# Altium PCB Node_Sensor_Lora_PCB.PcbDoc
Units mm, origin at the board's own origin, x right, y up, seen from the top; angles counter-clockwise.
Board outline 71.5 x 50 mm, 2 copper layers (Top Layer, Bottom Layer), stack 1.58 mm thick; 76 components, 65 nets, 321 pads, 67 vias.
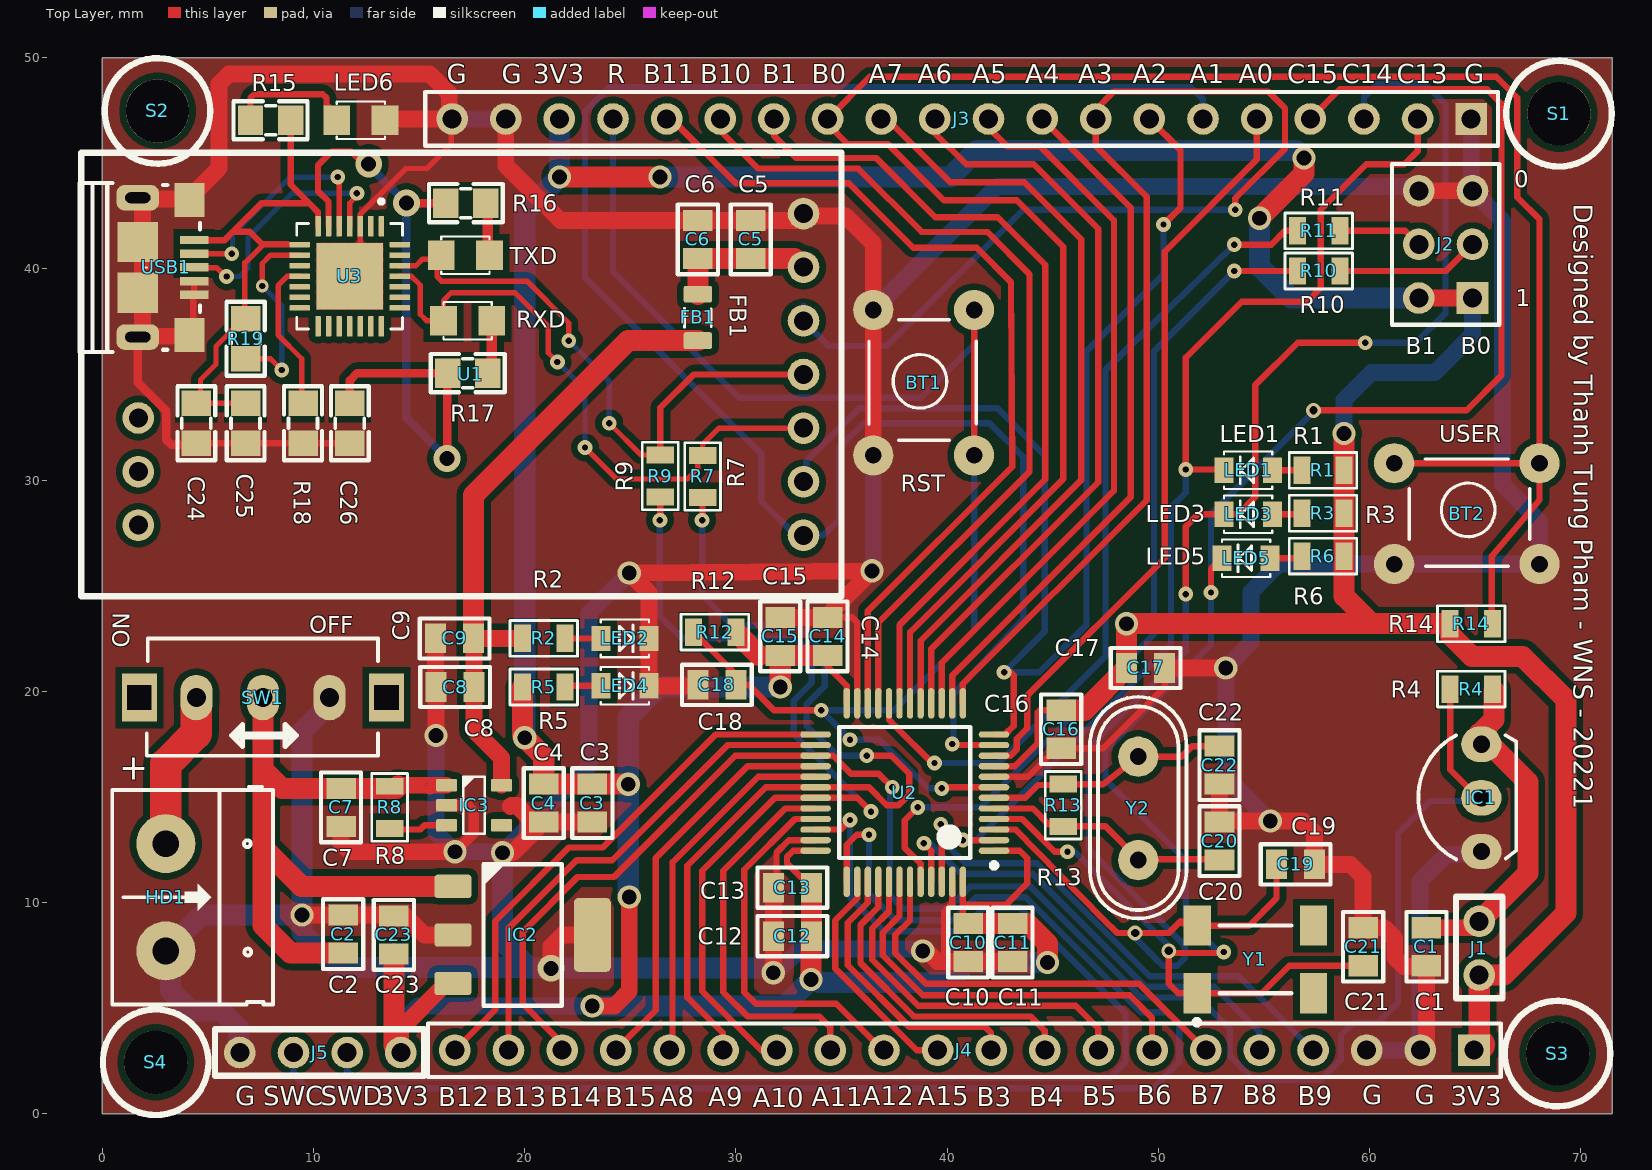
[diagram p0: Top Layer view]
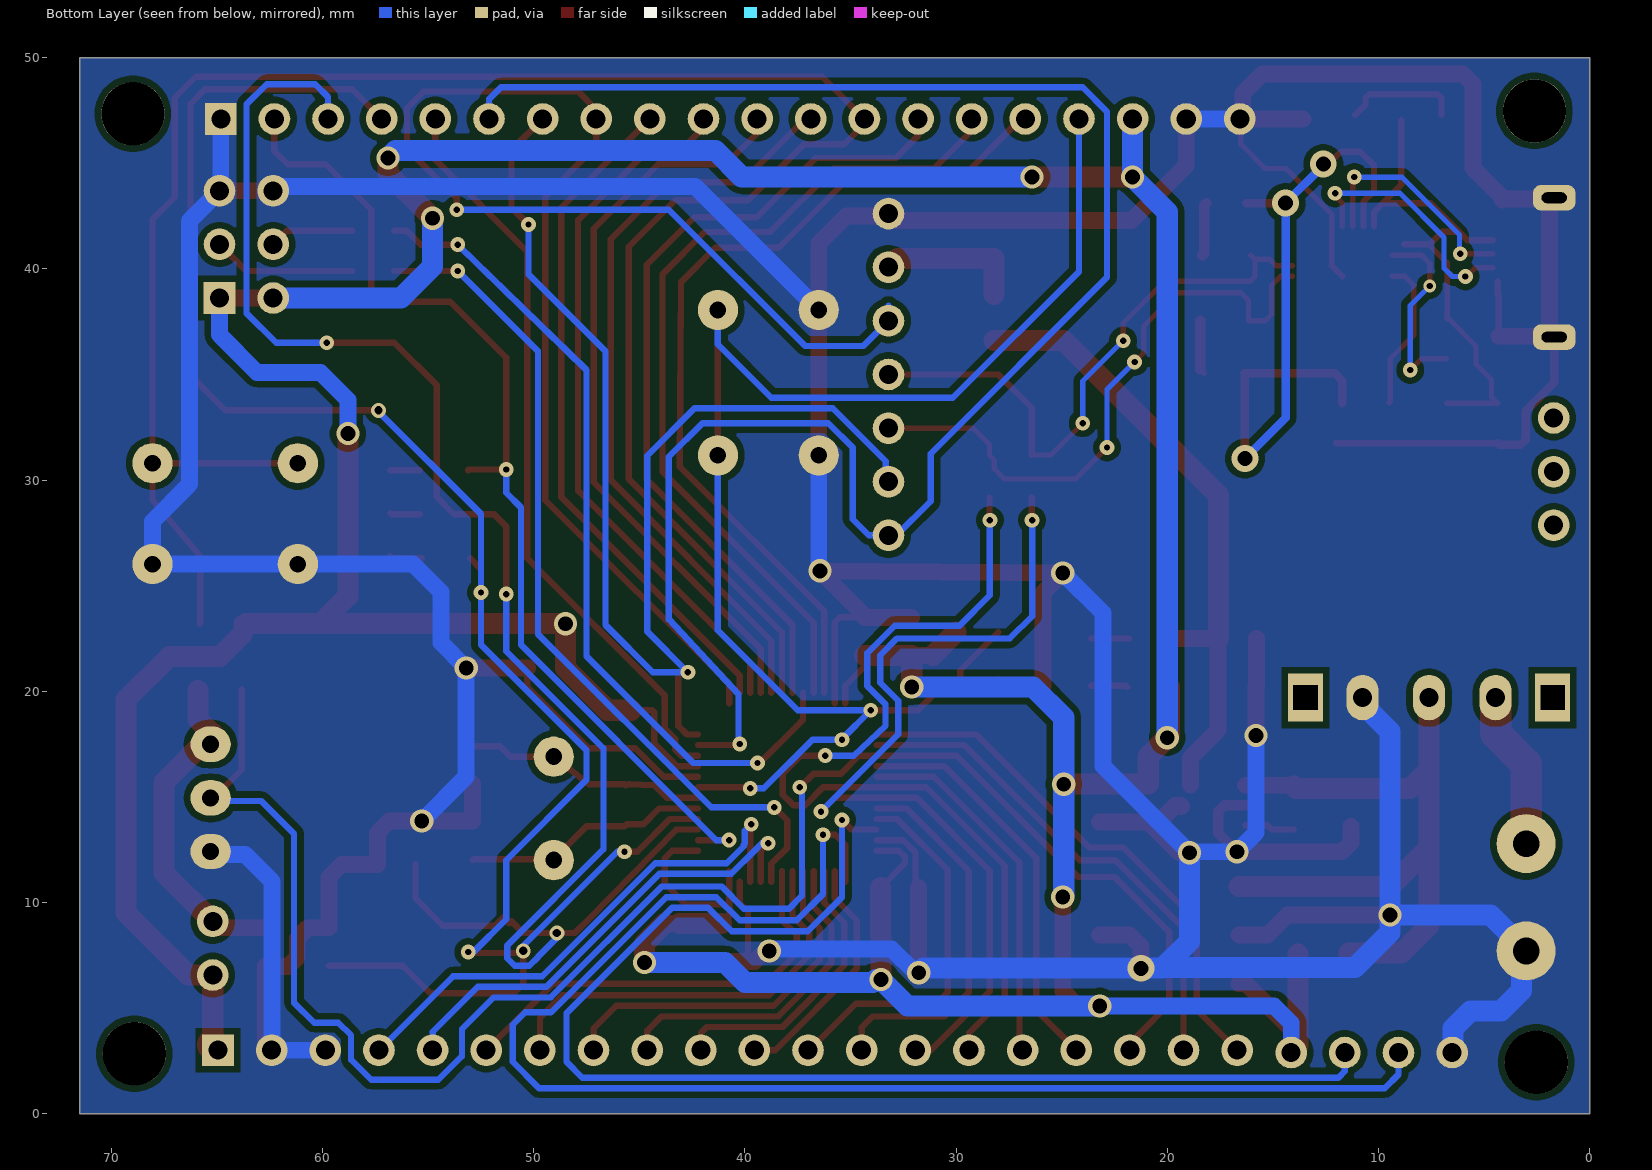
[diagram p1: Bottom Layer view, seen from below]
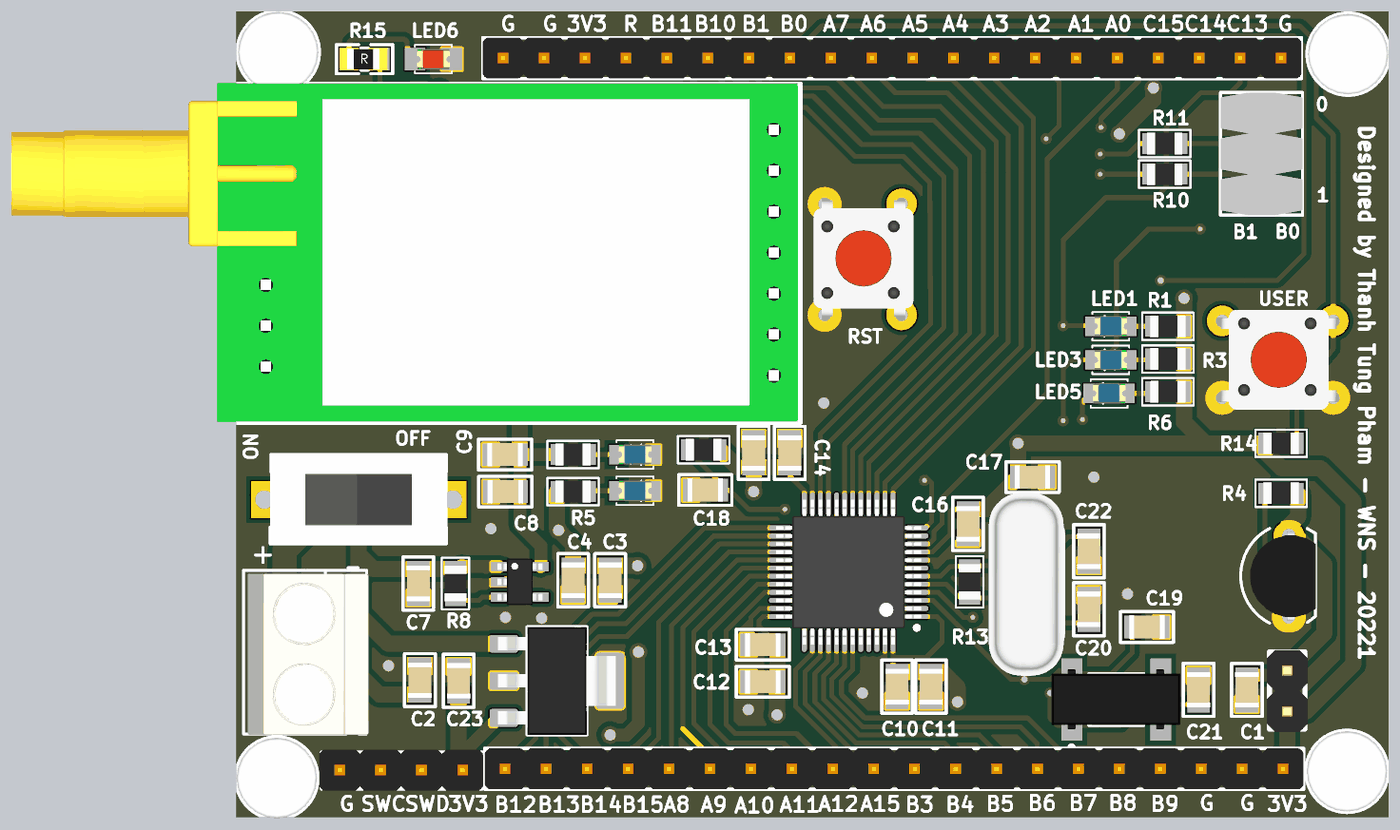
[diagram p2: 3D render of the assembled board from above, using the file's embedded part models]

## Layer stack, top to bottom
Top Solder: solder mask 0.01, Solder Resist, Dk 3.5
Top Layer: signal copper 0.035
Dielectric 1: dielectric 1.51, FR-4, Dk 4.8
Bottom Layer: signal copper 0.035
Bottom Solder: solder mask 0.01, Solder Resist, Dk 3.5

## Board outline
0,0 71.5,0 71.5,50 0,50

## Design rules (kind name [scope] priority, off if disabled: settings)
Clearance [IsRegion] p1: gap=0.3 ignorepadtopadclearanceinfootprint=FALSE
Clearance Clearance_1 [All] p2: gap=0.2 ignorepadtopadclearanceinfootprint=FALSE except(0.3: Fill-Fill Fill-Poly Fill-Region Poly-Poly Poly-Region Region-Region)
ComponentClearance [All] p1: gap=0.1 collisioncheckmode=3 verticalgap=0.1 showdistances=FALSE
HoleSize [All] p1: absolutevalues=TRUE maxlimit=4 minlimit=0.3 maxpercent=80.000 minpercent=20.000
HoleToHoleClearance [All] p1: gap=0.3 allowstackedmicrovias=TRUE
MinimumSolderMaskSliver [All] p1: minsoldermaskwidth=0.1
PolygonConnect [All] p1: connectstyle=Direct reliefconductorwidth=0.254 reliefentries=4 polygonreliefangle="90 Angle" airgapwidth=0.254
RoutingVias PowerVias [InNetClass('POWER')] p1: holewidth=0.7 width=1.1 viastyle="Through Hole" minholewidth=0.7 minwidth=1.1 maxholewidth=0.7 maxwidth=1.1
RoutingVias SignalVias [All] p2: holewidth=0.3 width=0.7 viastyle="Through Hole" minholewidth=0.3 minwidth=0.7 maxholewidth=0.3 maxwidth=0.7
SilkToSilkClearance [All] p1: silktosilkclearance=0.1
SilkToSolderMaskClearance [IsPad] p1: minsilkscreentomaskgap=0.1 clearancetoexposedcopper=TRUE
SolderMaskExpansion [All] p1: expansion=0.1 istentingtop=FALSE
Width POWER [InNetClass('POWER')] p1: maxlimit=1.5 minlimit=0.25 preferedwidth=0.8
Width SIGNAL [All] p2: maxlimit=0.5 minlimit=0.2 preferedwidth=0.3
24 further rules are at their usual default settings.

## Classes and differential pairs
net class POWER: 3.3V 3V3 GND VBAT VCC3.3V VDD3V3 VIN

## Components (designator, comment, footprint, x,y, rotation, side; value= is the part's Value field where it differs from the comment)
BT1 "" SW4 36.3,31.5 r90 top locked
BT2 "BT" SW4 61.5,31 r0 top
C1 "approved sub OK" CAPC2012X135N 62.7,7.9 r90 top value=0.1uF
C2 "approved sub OK" CAPC2012X135N 11.4,8.5 r90 top value=10uF
C3 "approved sub OK" CAPC2012X135N 23.2,14.7 r270 top value=10uF
C4 "approved sub OK" CAPC2012X135N 20.9,14.7 r270 top value=100nF
C5 "approved sub OK" CAPC2012X135N 30.7,41.4 r90 top value=10uF
C6 "approved sub OK" CAPC2012X135N 28.2,41.4 r90 top value=100nF
C7 "approved sub OK" CAPC2012X135N 11.3,14.5 r270 top value=10uF
C8 "approved sub OK" CAPC2012X135N 16.7,20.2 r180 top value=10uF
C9 "approved sub OK" CAPC2012X135N 16.68,22.5 r180 top value=100nF
C10 "approved sub OK" CAPC2012X135N 41,8.1 r270 top value=10uF
C11 "approved sub OK" CAPC2012X135N 43.1,8.1 r270 top value=100nF
C12 "approved sub OK" CAPC2012X135N 32.672,8.4 r180 top value=10uF
C13 "approved sub OK" CAPC2012X135N 32.672,10.7 r180 top value=100nF
C14 "approved sub OK" CAPC2012X135N 34.34,22.6 r90 top value=10uF
C15 "approved sub OK" CAPC2012X135N 32.1,22.6 r90 top value=100nF
C16 "approved sub OK" CAPC2012X135N 45.4,18.2 r270 top value=10uF
C17 "approved sub OK" CAPC2012X135N 49.4,21.1 r0 top value=100nF
C18 "approved sub OK" CAPC2012X135N 29.1,20.3 r180 top value=0.1uF
C19 "approved sub OK" CAPC2012X135N 56.5,11.8 r180 top value=20pF
C20 "approved sub OK" CAPC2012X135N 52.9,12.9 r270 top value=20pF
C21 "approved sub OK" CAPC2012X135N 59.7,7.9 r270 top value=20pF
C22 "approved sub OK" CAPC2012X135N 52.9,16.5 r90 top value=20pF
C23 "approved sub OK" CAPC2012X135N 13.8,8.46 r90 top value=0.1uF
C24 "105" "tu 0805" 4.45,32.69 r270 top
C25 "105" "tu 0805" 6.781,32.69 r270 top
C26 "105" "tu 0805" 11.72,32.69 r270 top
FB1 "2K2 @ 100 MHz" FBC2012N 28.2,37.7 r270 top
HD1 "Header 2" HED2 3,12.78 r270 top
IC1 "DS18S20" DS18S20 65.3,14.95 r90 top
IC2 "TC1262-3.3VDB" SOT223 19.9,8.46 r0 top
IC3 "SPX3819_3V3" SOT23-5 17.6,14.6 r0 top
J1 "Header 2x1" HDR_2x1 65.2,6.56 r90 top
J2 "Header 3X2" HDR2X3 64.88,38.62 r90 top
J3 "Header 20" HDR1X20#1 64.82,47.1 r180 top
J4 "Header 20" HDR1X20#2 64.95,3 r180 top
J5 "Header 4" "HDR _4PINS" 14.13,2.89 r180 top
LED1 "LED SMD" SM-LED-0805-Blue 55.4,30.459 r180 top
LED2 "LED SMD" SM-LED-0805-Blue 23.6,22.5 r0 top
LED3 "LED SMD" SM-LED-0805-Blue 55.4,28.38 r180 top
LED4 "LED SMD" SM-LED-0805-Blue 23.6,20.253 r0 top
LED5 "LED SMD" SM-LED-0805-Blue 55.3,26.3 r180 top
LED6 "LED 0805" LED-0805-Red 11.094,47.039 r0 top
R1 "100R" RESC2012N_ZERO 57.8,30.459 r180 top value=330R
R2 "330R" RESC2012N_ZERO 20.9,22.5 r0 top
R3 "100R" RESC2012N_ZERO 57.8,28.427 r180 top value=330R
R4 "100R" RESC2012N_ZERO 64.82,20.1 r0 top value=10K
R5 "100R" RESC2012N_ZERO 20.9,20.2 r0 top value=330R
R6 "100R" RESC2012N_ZERO 57.8,26.4 r180 top value=330R
R7 "100R" RESC2012N_ZERO 28.42,30.17 r90 top value=330R
R8 "100R" RESC2012N_ZERO 13.6,14.5 r270 top value=100K
R9 "100R" RESC2012N_ZERO 26.42,30.19 r90 top value=330R
R10 "100R" RESC2012N_ZERO 57.6,39.9 r0 top value=100K
R11 "100R" RESC2012N_ZERO 57.6,41.8 r180 top value=100K
R12 "100R" RESC2012N_ZERO 29,22.8 r180 top value=10K
R13 "100R" RESC2012N_ZERO 45.5,14.6 r90 top value=1M
R14 "100R" RESC2012N_ZERO 64.82,23.2 r0 top value=10K
R15 "1K" "tro smd 0805" 7.96,47.1 r0 top
R16 "1K" "tro smd 0805" 17.21,43.05 r180 top
R17 "1K" "tro smd 0805" 17.3,35 r180 top
R18 "10K" "tro smd 0805" 9.44,32.69 r90 top
R19 "4.7K" "tro smd 0805" 6.72,36.69 r90 top
RXD "LED 0805" LED-0805-Red 18.436,37.54 r180 top (schematic designator LED8)
S1 "Screw" "SCREW 3 SMALL" 68.98,47.35 r0 top
S2 "Screw" "SCREW 3 SMALL" 2.61,47.48 r0 top
S3 "Screw" "SCREW 3 SMALL" 68.91,2.84 r0 top
S4 "Screw" "SCREW 3 SMALL" 2.52,2.43 r0 top
SW1 "SS-12F44" SW102 7.6,19.7 r0 top value="Switch 102 On Board"
TXD "LED 0805" LED-0805-Green 18.33,40.64 r180 top (schematic designator LED7)
U1 "EE32_TTL_100" E32_TTL_100 17,35 r180 top locked
U2 "STM32F103C8T6" STM32_LQPF48 37.997,15.2 r180 top locked
U3 "CP2102" CP2102 11.71,39.65 r270 top locked
USB1 "USB Micro 5p DIP" "USB Micro 5p DIP" 1.675,40.069 r270 top
Y1 "32.7680KHz" Epson_MC-306_32.7680K-A0-ROHS_0 54.6,7.3 r0 top
Y2 "8MHz" CRYSTAL 49.05,14.45 r270 top value=4Mhz

## Footprints (in the part's own frame and the unit in brackets; to place one, negate y for a bottom-side part, rotate by r counter-clockwise, add the part's x,y. Pads: shape width x height; smd on the part's side, far side on the other; paste and mask are expansions set on the pad)
CAPC2012X135N [mm] "Chip Capacitor, Body 2.0x1.2mm, EIA 0805, IPC Medium Density"
  round 0.254 on Mech15: 0(0,0)
  rect 1x1.4 smd: 1(-0.9,0) 2(0.9,0)
  silkscreen extent -1.65,-0.95 1.65,0.95, body extent -1.1,-0.72 1.1,0.73, height 1.34
CP2102 [mm]
  rrect25% 0.97x0.26 smd: 1(-2.37,1.5) 2(-2.37,1) 3(-2.37,0.5) 4(-2.37,0) 5(-2.37,-0.5) 6(-2.37,-1) 7(-2.37,-1.5) 15(2.37,-1.5) 16(2.37,-1) 17(2.37,-0.5) 18(2.37,0) 19(2.37,0.5) 20(2.37,1) 21(2.37,1.5)
  rrect25% 0.26x0.97 smd: 8(-1.5,-2.37) 9(-1,-2.37) 10(-0.5,-2.37) 11(0,-2.37) 12(0.5,-2.37) 13(1,-2.37) 14(1.5,-2.37) 22(1.5,2.37) 23(1,2.37) 24(0.5,2.37) 25(0,2.37) 26(-0.5,2.37) 27(-1,2.37) 28(-1.5,2.37)
  rect 3.15x3.15 smd paste-0.575: 29(0,0)
  silkscreen extent -3.64,-2.5 2.5,2.5
CRYSTAL [mm]
  round 1.905 hole 0.8: 1(-2.45,0) 2(2.45,0)
  silkscreen extent -5.28,-2.29 5.21,2.29, body extent -5.68,-2.36 5.68,2.29, height 3.5
DS18S20 [mil] "TO-92"
  oval 66x75 hole 32: 1(100,0) 2(0,0) 3(-100,0)
  silkscreen extent -115,-65 117,117, body extent -109,-66 109,95, height 385
E32_TTL_100 [mm]
  round 1.5 hole 0.9: 1(-16.2,7.62) 2(-16.2,5.08) 3(-16.2,2.54) 4(-16.2,0) 5(-16.2,-2.54) 6(-16.2,-5.08) 7(-16.2,-7.62) 8(15.3,7.14) 9(15.3,4.6) 10(15.3,2.06)
  silkscreen extent -18,-10.5 18,10.5, body extent -17.84,-10.55 30.94,10.45, height 9.01
Epson_MC-306_32.7680K-A0-ROHS_0 [mm]
  rect 1.3x1.9 smd paste+0 mask+0: 1(-2.75,-1.6) 2(2.75,-1.6) 3(2.75,1.6) 4(-2.75,1.6)
  silkscreen extent -2.9,-3.1 1.7,1.6, body extent -4.1,-2.65 4.1,2.65, height 0.25
FBC2012N [mm] "Ferrite Bead Chip, Body 2.0x1.2mm, 0805, IPC Medium Density"
  round 0.508 on Mech15: 0(0,0)
  rrect25% 0.8x1.35 smd: 1(-1.1,0) 2(1.1,0)
  silkscreen extent -0.43,-0.64 0.46,0.64, body extent -1,-0.62 1,0.63, height 0.9
HDR1X20#1 [mm] "Connector; Header; 20 Position"
  rect 1.5x1.5 hole 0.9: 1(0,0)
  round 1.5 hole 0.9: 2(2.54,0) 3(5.08,0) 4(7.62,0) 5(10.16,0) 6(12.7,0) 7(15.24,0) 8(17.78,0) 9(20.32,0) 10(22.86,0) 11(25.4,0) 12(27.94,0) 13(30.48,0) 14(33.02,0) 15(35.56,0) 16(38.1,0) 17(40.64,0) 18(43.18,0) 19(45.72,0) 20(48.26,0)
  silkscreen extent -1.27,-1.27 49.53,1.27, body extent -1.27,-1.27 49.53,1.27, height 8.89
HDR1X20#2 [mm] "Connector; Header; 20 Position"
  rect 1.5x1.5 hole 0.9: 1(0,0)
  round 1.5 hole 0.9: 2(2.54,0) 3(5.08,0) 4(7.62,0) 5(10.16,0) 6(12.7,0) 7(15.24,0) 8(17.78,0) 9(20.32,0) 10(22.86,0) 11(25.4,0) 12(27.94,0) 13(30.48,0) 14(33.02,0) 16(38.1,0) 17(40.64,0) 18(43.18,0) 19(45.72,0) 20(48.26,0)
  round 1.5 hole 0.9 mask+0.1: 15(35.56,0)
  silkscreen extent -1.27,-1.27 49.53,1.27, body extent -1.27,-1.27 49.53,1.27, height 8.89
HDR2X3 [mm] "Connector; Header; 3x2 Position"
  rect 1.5x1.5 hole 0.9: 1(0,0)
  round 1.5 hole 0.9: 2(0,2.54) 3(2.54,0) 4(2.54,2.54) 5(5.08,0) 6(5.08,2.54)
  silkscreen extent -1.27,-1.27 6.35,3.81, body extent -1.27,-1.27 6.35,3.81, height 8.77
"HDR _4PINS" [mm]
  round 1.5 hole 0.9: 1(0,0) 2(2.54,0) 3(5.08,0) 4(7.62,0)
  silkscreen extent -1.1,-1.1 8.8,1.1, body extent -1.18,-1.3 8.98,1.24, height 8.89
HDR_2x1 [mm]
  round 1.5 hole 0.9: 1(0,0) 2(2.54,0)
  silkscreen extent -1.1,-1.1 3.7,1.1, body extent -1.27,-1.27 3.81,1.27, height 8.54
HED2 [mil] "Header 2, 2 pin, hight 300mil, Pin to Pin 200, Colour Green"
  round 110 hole 50: 1(0,0) 2(200,0)
  silkscreen extent -106,-100 300,200, body extent -92,-90 302,205, height 394
LED-0805-Green [mil]
  rect 50x55 smd: 1(0,0) 2(90,0)
  silkscreen extent 0,-35 90,35, body extent 5,-25 85,25, height 43
LED-0805-Red [mil]
  rect 50x55 smd: 1(0,0) 2(90,0)
  silkscreen extent 0,-35 90,35, body extent 5,-25 85,25, height 43
RESC2012N_ZERO [mm] "Chip Resistor, Body 2.0x1.2mm, 0805, IPC Medium Density"
  rect 0.8x1.3 smd: 1(-1,0) 2(1,0)
  silkscreen extent -1.6,-0.85 1.6,0.85, body extent -1.1,-0.67 1.1,0.68, height 0.69
"SCREW 3 SMALL" [mm] "Hole 3mm, outline 5mm"
  round 3 hole 3 mask+0.1: 1(0,0)
  silkscreen extent -2.5,-2.5 2.5,2.5, body extent -2.5,-2.5 2.5,2.5, height 1.73
SM-LED-0805-Blue [mm]
  rect 0.9x1.2 smd: 1(0,0) 2(2.286,0)
  silkscreen extent 0,-0.89 2.29,0.89, body extent 0.13,-0.62 2.15,0.63, height 1.1
SOT23-5 [mm]
  round 0.5 on Mech15: 0(0,0)
  rrect25% 1x0.6 smd: 1(-1.3,0.95) 2(-1.3,0) 3(-1.3,-0.95) 4(1.3,-0.95) 5(1.3,0.95)
  silkscreen extent -0.51,-1.35 0.51,1.35, body extent -1.4,-1.45 1.4,1.45, height 1.44
SOT223 [mm] "SOT223 /SC-73"
  round 1 on Mech15: 0(0,0)
  rrect25% 1.75x1.1 smd: 1(-3.3,2.3) 2(-3.3,0) 3(-3.3,-2.3)
  rrect25% 1.75x3.5 smd: 4(3.3,0)
  silkscreen extent -1.85,-3.35 1.85,3.35, body extent -3.65,-3.35 3.65,3.35, height 1.8
STM32_LQPF48 [mm]
  oval 1.45x0.3 smd: 1(-4.225,2.75) 2(-4.225,2.25) 3(-4.225,1.75) 4(-4.225,1.25) 5(-4.225,0.75) 6(-4.225,0.25) 7(-4.225,-0.25) 8(-4.225,-0.75) 9(-4.225,-1.25) 10(-4.225,-1.75) 11(-4.225,-2.25) 12(-4.225,-2.75) 25(4.225,-2.75) 26(4.225,-2.25) 27(4.225,-1.75) 28(4.225,-1.25) 29(4.225,-0.75) 31(4.225,0.25) 32(4.225,0.75) 33(4.225,1.25) 34(4.225,1.75) 35(4.225,2.25) 36(4.225,2.75)
  oval 0.3x1.45 smd: 13(-2.75,-4.225) 14(-2.25,-4.225) 15(-1.75,-4.225) 16(-1.25,-4.225) 17(-0.75,-4.225) 18(-0.25,-4.225) 19(0.25,-4.225) 20(0.75,-4.225) 21(1.25,-4.225) 22(1.75,-4.225) 23(2.25,-4.225) 24(2.75,-4.225) 37(2.75,4.225) 38(2.25,4.225) 39(1.75,4.225) 40(1.25,4.225) 41(0.75,4.225) 42(0.25,4.225) 43(-0.25,4.225) 44(-0.75,4.225) 45(-1.25,4.225) 46(-1.75,4.225) 47(-2.25,4.225) 48(-2.75,4.225)
  oval 1.45x0.3 smd mask+0.1: 30(4.225,-0.25)
  silkscreen extent -4.35,-3.1 3.1,3.57, body extent -4.5,-4.5 4.5,4.5, height 1.6
SW4 [mil] "SW button 4pin, 250 x250 mil"
  round 75 hole 31: 1(-13,-8) 1(258,-8) 2(-13,-196) 2(258,-196)
  silkscreen extent 15,-200 240,0, body extent -31,-225 281,19, height 276
SW102 [mil] "Switch 102 On Board nho"
  oval 60x85 hole 35: 1(-124.02,0) 2(0,0) 3(124.02,0)
  rect 65x90 hole 45 square: 4(230.31,0) 5(-230.32,0)
  silkscreen extent -217,-108 215,110, body extent -217,-110 216,110, height 384
"tro smd 0805" [mm]
  rect 1.2x1.4 smd: 1(-0.946,-0.061) 2(0.954,-0.061)
  silkscreen extent -1.75,-0.97 1.75,0.84, body extent -1.56,-0.76 1.44,0.64, height 0.53
"tu 0805" [mm] "Compoment SMD 80x50mil"
  rect 1.2x1.4 smd: 1(-0.946,-0.003) 2(0.954,-0.003)
  silkscreen extent -1.75,-0.89 1.75,0.89, body extent -1.01,-0.64 1.01,0.63, height 0.61
"USB Micro 5p DIP" [mm]
  rect 0.4x1.35 smd mask+0.05: 1(-1.3,2.675) 2(-0.65,2.675) 3(0,2.675) 4(0.65,2.675) 5(1.3,2.675)
  rrect60% 1.2x2 hole 0.5 slot 1.2 at 90 deg: 5(-3.3,0) 5(3.3,0)
  rect 1.6x1.4 smd: 5(-3.2,2.45) 5(3.2,2.45)
  rect 1.9x1.9 smd paste-10: 5(-1.2,0) 5(1.2,0)
  silkscreen extent -4,-2.75 4,2.95, body extent -3.93,-2.76 3.93,2.9, height 2.85

## Part data
BT1 BT2: library part BUTTON
C1 C2 C3 C4 C5 C6 C7 C8 C9 C10 C11 C12 C13 C14 C15 C16 C17 C18 C19 C20 C21 C22 C23: library part "CAP C_0805", "Capacitor SMD Cer 1.8nF 10% 50V X7R 0805", Manufacturer 1="AVX Corporation", Manufacturer Part Number 1=08055C182KAT2A, Operating Temperature="-55°C ~ 125°C", Package / Case="0805 (2012 metric)", Ratings="50V; X7R", Supplier Part Number 1=478-1374-1-ND, Tolerance=±10%, SCDType=source*, Supplier 1=Digi-Key
C24 C25 C26: library part "Tu 0805 105 50V 10%", "Dán", Chung_Loai=Dán, Don_Vi=Con, Ma_Hang=MH004552, So_Chan=2, Ten_Linh_Kien="Tụ 0805 105-1uF 10% 50V"
FB1: library part FERRITE_2K2-100MHz_0805, "Ferrite bead 2.2K Ohm at 100 MHz 200mA 0805 SMD", Current Rating=200mA, DC Resistance (DCR)="800 mOhm Max", Impedance @ Frequency="600 Ohm @ 100MHz", Manufacturer 1="Laird-Signal Integrity Products", Manufacturer Part Number 1=HZ0805B222R-10, Package / Case="0805 (2012 Metric)", Ratings="200 mA; 800 mOhm DC", Supplier Part Number 1=240-2562-1-ND, ComponentLink1Description=http://www.lairdtech.com/WorkArea/linkit.aspx?LinkIdentifier=id&ItemID=4879, ComponentLink1URL=http://www.lairdtech.com/WorkArea/linkit.aspx?LinkIdentifier=id&ItemID=4879, Filter Type="Differential Mode - Single", Height (Max)="0.043\" (1.09mm)", Mounting Type="Surface Mount", SCDType=source, Size / Dimension="0.063\" L x 0.031\" W (1.60mm x 0.80mm)", Supplier 1=Digi-Key
HD1: "Header 2 (Green)"
IC1: "High Precision  1-Wire® Digital Thermometer"
IC2: library part AMS1117, "SOT223, Fixed Voltage"
IC3: library part SPX3819
J1: library part Header_2pins
J2: "Header, 3-Pin, Dual row", LatestRevisionDate=17-Jul-2002, LatestRevisionNote="Re-released for DXP Platform.", Publisher="Altium Limited"
J3 J4: "Header, 20-Pin", LatestRevisionDate=17-Jul-2002, LatestRevisionNote="Re-released for DXP Platform.", Publisher="Altium Limited"
J5: "Header 4 (Green)"
LED1 LED2 LED3 LED4 LED5: library part "LED SMD 0805"
LED6 RXD: library part "LED 0805 Do", "Dán", Chung_Loai=Dán, Don_Vi=Con, Ma_Hang=MH000897, Ten_Linh_Kien="LED 0805 Màu Đỏ (Red)"
R1 R2 R3 R4 R5 R6 R7 R8 R9 R10 R11 R12 R13 R14: library part RES_0805, "Resistor SMD chip 0.0 Ohm 0.125W 0805", Manufacturer 1="Samsung Electro-Mechanics America, Inc", Manufacturer 2="Stackpole Electronics Inc", Manufacturer 3=Yageo, Manufacturer 4="Panasonic Electronic Components", Manufacturer 5="Rohm Semiconductor", Manufacturer Part Number 1=RC2012J000CS, Manufacturer Part Number 2=RMCF0805ZT0R00, Manufacturer Part Number 3=RC0805JR-070RL, Manufacturer Part Number 4=ERJ-6GEY0R00V, Manufacturer Part Number 5=MCR10ERTJ000, Package / Case="0805 (2012 metric)", Ratings=1/8W, Supplier Part Number 1=1276-5466-6-ND, Tolerance=N/A, RoHS 1="RoHS Compliant", RoHS 2="RoHS Compliant", RoHS 3="RoHS Compliant", RoHS 4="RoHS Compliant", RoHS 5="RoHS Compliant", SCDType=spec, Supplier 1=Digi-Key, Supplier 2=Digi-Key, Supplier 3=Digi-Key, Supplier 4=Digi-Key, Supplier 5=Digi-Key, Supplier Part Number 2=RMCF0805ZT0R00DKR-ND, Supplier Part Number 3=311-0.0ARDKR-ND, Supplier Part Number 4=P0.0ADKR-ND, Supplier Part Number 5=RHM0.0CPDKR-ND
R15 R16 R17 R18 R19: library part "Tro 0805 1% 10k", "Dán", Chung_Loai=Dán, Don_Vi=Con, Ma_Hang=MH005473, So_Chan=2, Ten_Linh_Kien="Trở 0805 1% 10k"
SW1: library part SW102A, "Switch 102 on Broad"
TXD: library part "LED 0805 Xanh La", "Dán", Chung_Loai=Dán, Don_Vi=Con, Ma_Hang=MH002326, Ten_Linh_Kien="LED 0805 Màu Xanh Lá (Green)"
U1: library part "Module Lora E32_TTL_100"
U2: library part STM32F103xx_LQFP48, "STM32 ARM-based 32-bit MCU with 64 Kbytes Flash, 48-pin LQFP, Industrial Temperature", ComponentLink1Description="Manufacturer Link", ComponentLink1URL=www.st.com/stm32, ComponentLink2Description=Datasheet, ComponentLink2URL=http://www.st.com/stonline/products/literature/ds/13587.pdf, DatasheetVersion="rev6, Mar-2008", PackageDescription="48-Pin Low-Profile Quad Flat Pack, 7 x 7 mm Body, 0.5 mm Pitch (LQFP48)", PackageReference=LQFP48, PackageVersion=Mar-2008, Published=30-May-2008, Publisher="Altium Limited"
USB1: "USB Type B", Ma_Hang=MH005145, Ten="MicroUSB MK5P DIP"
Y1: library part Crys_Epson_MC-306_32.7680K-A0-ROHS_eec, "CRYSTAL 32.7680KHZ 12.5PF SMD", Digikey Part Number=SER2407CT-ND, Manufacturer=Epson, Mouser Part Number=732-MC30632.7680KA0R, Package=SMT_XTAL_8MM0_3MM20, Part Number=MC-306, Temperature="-40°C to +85°C", Temperature Range High=+85°C, Temperature Range Low=-40°C, ComponentLink1Description=Upverter, ComponentLink1URL=https://upverter.com/upn/revision/56373362b6f292da/, ComponentLink2Description=Datasheet, ComponentLink2URL=http://media.digikey.com/pdf/Data%20Sheets/Epson%20PDFs/MC-306%20,405,%20406.pdf, Digikey Description="CRYSTAL 32.7680KHZ 12.5PF SMD", helpURL=https://upverter.com/upn/revision/56373362b6f292da/, Lead Free=yes, Price=0.391082880903, RoHS=TRUE, Supplier 1=Digi-Key, Supplier 2=Mouser, Supplier Part Number 1=SER2407CT-ND, Supplier Part Number 2=732-MC30632.7680KA0R
Y2: library part CRYSTAL, "Crystal For all Crystal 2pin."

## Via types
v1: diameter 0.7, hole 0.3, Top Layer to Bottom Layer, tented both sides, 36 vias
v2: diameter 1.1, hole 0.7, Top Layer to Bottom Layer, tented both sides, 23 vias
v3: diameter 1.27, hole 0.711, Top Layer to Bottom Layer, tented both sides, 4 vias
v4: diameter 0.7, hole 0.4, Top Layer to Bottom Layer, tented both sides, 3 vias
v5: diameter 0.6, hole 0.3, Top Layer to Bottom Layer, tented both sides, 1 vias

## Nets (pads, with @x,y where several pads share a name; then routed paths per layer and width w, separated by ;. In a path a pad name is that pad's centre, name@x,y a point inside that pad or via, vN(x,y) a via of type N, cw(c..) or ccw(c..) an arc to the next point about the centre after c; other vN are vias at no path point)
3.3V: C8.1 C9.1 FB1.2 IC3.5 R2.1 | length 30.1
  Top Layer w0.8: C9.1 R2.1 ; C9.1@17.6,22.38 C8.1 17.6,18.15 18.9,16.85 IC3.5
  Top Layer w1: C9.1 17.58,29.28 24.9,36.6 FB1.2
3V3: C3.1 C4.1 C10.1 C11.1 C12.1 C13.1 C14.1 C15.1 C16.1 C17.1 C23.1 IC2.3 J1.1 J2.1 J2.2 J3.18 J4.1 J5.1 R1.1 R3.1 R5.1 R6.1 R12.1 R14.1 U2.1 U2.9 U2.24 U2.36 U2.48 | length 260.9
  Top Layer w0.3: C13.1 32.42,11.852 32.42,12.156 32.714,12.45 U2.36 ; C14.1 34.34,21.16 35.247,20.253 U2.24 ; U2.48@40.747,11.475 U2.48 40.747,9.9 ; C10.1@41.1,9 40.747,9.353 40.747,9.9 ; U2.1 43.443,12.45 43.8,12.093 43.8,10.9 42.8,9.9 40.747,9.9 ; U2.9 43.211,16.45 44.3,17.539 44.3,19 44.4,19.1 C16.1
  Top Layer w0.8: J5.1 14.13,4.015 16.275,6.16 IC2.3 ; v2(23.2,5.1) 24.25,5.1 24.95,5.8 v2(24.95,10.25) ; 31.1,21.7 C15.1 ; C12.1@33.55,8.378 C12.1 ; C11.1 43.8,9 ; J2.2 J2.1 ; R14.1@63.62,23.2 63.72,23.1 R14.1 R14.1@63.82,22.68
  Top Layer w1: C23.1 13.8,3.22 J5.1 ; R5.1 19.9,17.9 v2(20,17.8) 20.9,16.9 C4.1 C3.1 v2(24.9,15.6) ; v2(21.65,44.35) v2(26.4,44.35) ; R12.1 31.1,21.7 ; v2(32.1,20.2) C15.1 C14.1 ; v2(33.55,6.35) C12.1@33.55,8.378 ; C12.1 C13.1 ; C10.1@41.1,9 C11.1 ; 43.8,9 44.75,8.05 v2(44.75,7.15) ; C16.1 46.5,19.1 C17.1 v2(48.5,23.2) 60.1,23.2 ; v2(54.79,42.4) 56.9,44.51 v2(56.9,45.25) ; v2(58.8,32.2) R1.1 R3.1 R6.1 58.8,24.5 60.1,23.2 ; R14.1@63.62,23.2 60.1,23.2 ; R14.1@63.82,22.68 64.85,21.65 67.25,21.65 69.3,19.6 69.3,9.5 66.36,6.56 J1.1 J4.1@65.2,3.26
  Top Layer w1.5: J4.1@64.94,3 J4.1@65.2,3.26
  Bottom Layer w0.8: J5.1 14.13,4.29 14.94,5.1 v2(23.2,5.1) ; v2@21.64,44.36 v2(21.65,44.35) ; v2(58.8,32.2) 58.8,33.8 60.1,35.1 63.1,35.1 64.88,36.88 J2.1
  Bottom Layer w1: v2(20,17.8) 20,42.7 v2(21.65,44.35) ; v2@21.64,44.36 J3.18 ; v2(23.2,5.1) 32.3,5.1 v2(33.55,6.35) 33.794,6.35 33.944,6.2 40,6.2 40.95,7.15 v2(44.75,7.15) ; v2(24.95,10.25) 24.95,10.277 24.9,10.327 v2(24.9,15.6) 24.9,18.75 26.35,20.2 v2(32.1,20.2) ; v2(26.4,44.35) 40.15,44.35 41.4,45.6 56.55,45.6 v2(56.9,45.25) ; v2(54.79,42.4) 54.79,40.11 56.28,38.62 J2.2
BOOT0: R10.1 U2.44 | length 40.4
  Top Layer w0.3: v1(38.61,14.5) 38,13.89 38,12.577 38.747,11.83 U2.44 ; v1(53.6,39.9) R10.1
  Bottom Layer w0.3: v1(38.61,14.5) 41.6,14.5 49.8,22.7 49.8,36.1 v1(53.6,39.9)
DM: U3.5 USB1.2 | length 10.9
  Top Layer w0.25: USB1.2@4.586,40.719 v1(6.129,40.72) ; v1(11.14,44.355) 11.21,44.285 U3.5
  Bottom Layer w0.25: v1(6.129,40.72) 6.158,40.749 6.158,41.618 8.88,44.34 11.125,44.34 v1(11.14,44.355)
DP: U3.4 USB1.3 | length 11.8
  Top Layer w0.25: USB1.3@4.575,40.06 5.4,40.06 5.82,39.64 v1(5.88,39.64) ; U3.4 11.71,43.118 12.05,43.458 v1(12.05,43.58)
  Bottom Layer w0.25: v1(5.88,39.64) 6.499,39.64 6.89,40.031 6.89,41.49 8.98,43.58 v1(12.05,43.58)
GND: BT1.1 BT2.2 C1.1 C2.2 C3.2 C4.2 C5.2 C6.2 C7.2 C8.2 C9.2 C10.2 C11.2 C12.2 C13.2 C14.2 C15.2 C16.2 C17.2 C18.2 C19.1 C20.1 C21.1 C22.1 C23.2 C24.2 C25.2 C26.2 HD1.2 IC1.3 IC2.2 IC2.4 IC3.2 J2.5 J2.6 J3.1 J3.19 J3.20 J4.2 J4.3 J5.4 LED2.2 LED4.2 LED6.2 R18.1 SW1.3 U1.7 U2.8 U2.23 U2.35 U2.47 U3.3 U3.29 USB1.4 USB1.5 | length 395.1
  Top Layer w0.25: U3.29@12.21,40.15 U3.3 12.215,42.025 12.215,42.595 13.07,43.45 14.37,44.75 15.364,44.75 16.514,45.9 J3.20@16.514,47.054
  Top Layer w0.3: USB1.5@4.3,36.81 4.3,38.719 4.35,38.769 USB1.4 ; C24.2@4.347,31.736 C25.2 6.786,31.744 R18.1 9.509,31.736 C26.2@12.007,31.736 ; U3.29 U3.29@12.21,40.15 ; LED6.2 LED6.2@13.569,46.85 ; J3.20@16.514,47.054 J3.20 ; C13.2 31.92,10.848 31.92,12.363 32.507,12.95 U2.35 ; C14.2 35.5,23.5 35.747,23.253 U2.23 ; U2.47 40.247,9.947 39.85,9.55 39.85,7.65 C10.2@40.3,7.2 ; C10.2 C10.2@41.1,7.2 ; U2.8 43.851,15.95 45.201,17.3 C16.2 47.4,17.3 50.3,20.2 C17.2
  Top Layer w0.4: USB1.5@1.675,36.769 1.675,34.625 3.02,33.28 3.02,31.909 3.254,31.675 4.286,31.675 C24.2@4.347,31.736
  Top Layer w0.5: IC3.2 17.3,14.6 17.58,14.32 17.58,13.28 v2(16.7,12.4)
  Top Layer w0.8: USB1.5@1.9,36.769 1.9,38.869 1.9,41.269 1.9,43.36 1.95,43.31 USB1.5@4.125,43.31 ; USB1.5@1.95,36.81 USB1.5@4.3,36.81 ; USB1.5@4.125,43.269 USB1.5@4.125,43.31 ; v2(9.45,9.4) C2.2 14.31,9.4 15.25,8.46 IC2.2 ; C7.2 11.3,12.82 11.72,12.4 v2(16.7,12.4) ; LED6.2@13.569,47.1 J3.20 16.426,47.234 16.426,48.304 15.5,49.23 5.989,49.23 5.52,48.761 5.52,44.764 4.125,43.369 USB1.5@4.125,43.31 ; C9.2 15.78,20.22 C8.2 v2(15.8,17.9) ; v2(18.95,12.35) 19.45,12.35 C4.2 ; J3.19 19.1,44.9 21.7,42.3 C6.2 C5.2 33.2,42.3 U1.7 33.32,42.5 35.2,42.5 36.503,41.197 36.503,38.053 BT1.1@36.503,31.17 ; 19.314,14.55 19.364,14.6 19.6,14.6 20.4,13.8 C4.2 ; v3(21.25,6.88) 21.25,7.917 21.793,8.46 IC2.4 ; C3.2 C4.2 ; C18.2@28,20.3 27.953,20.253 LED4.2 LED2.2 25.886,24.664 v2(24.95,25.6) v2(36.45,25.7) 34.34,23.59 C14.2 C15.2 ; v2(31.772,6.672) C12.2 C13.2 ; v2(38.85,7.7) 38.95,7.8 39.55,7.2 40.3,7.2 C10.2 ; C10.2@41.1,7.2 C11.2 ; C17.2 v2(53.2,21.1) ; C22.1 52.9,13.85 v2(55.3,13.85) 56.85,13.85 57.4,13.3 C19.1 59.1,11.8 59.7,11.2 C21.1 60.7,8.8 61.2,8.3 61.2,7.4 61.637,6.963 62.663,6.963 C1.1 62.7,3.3 J4.2@62.4,3 ; J2.6 J2.5
  Bottom Layer w0.8: SW1.3@10.75,19.4 SW1.3 ; v2(15.8,17.9) 15.8,13.3 v2(16.7,12.4) 18.9,12.4 v2(18.95,12.35) 23.05,16.45 23.05,23.7 v2(24.95,25.6) ; J3.20 J3.19 ; 20.2,6.9 20.19,6.91 v3@21.25,6.91 ; v2@31.544,6.9 v2(31.772,6.672) 31.929,6.672 33.057,7.8 38.75,7.8 v2(38.85,7.7) v2@38.8,7.65 ; v2(36.45,25.7) 36.503,25.753 BT1.1@36.503,31.17 ; BT1.1@36.503,38.053 42.35,43.9 62.14,43.9 J2.6 ; v2(55.3,13.85) 53.2,15.95 v2(53.2,21.1) 54.4,22.3 54.4,24.7 55.722,26.022 61.17,26.022 68.053,26.022 68.053,28.047 66.3,29.8 66.3,42.28 J2.5 64.82,43.76 J3.1 ; J4.3@59.86,3 J4.3 62.4,3 62.4,11 63.66,12.26 IC1.3@65.3,12.26
  Bottom Layer w1: J5.4 6.469,2.931 6.469,4.031 5.64,4.86 4.2,4.86 3.228,5.832 3.228,7.472 HD1.2 4.7,9.4 v2(9.45,9.4) ; SW1.3@10.75,19.4 9.45,18.1 v2(9.45,9.4) ; v2(18.95,12.35) 18.95,8.15 20.19,6.91 11.11,6.91 9.45,8.57 v2(9.45,9.4) ; 20.2,6.9 v2@31.544,6.9
NetIC3_3: IC3.3 R8.2 | length 2.4
  Top Layer w0.3: R8.2@14,13.45 15.05,13.45 15.25,13.65 IC3.3
NetJ2_3: J2.3 R10.2 | length 6.8
  Top Layer w0.3: R10.2 63.62,39.9 J2.3
NetJ2_4: J2.4 R11.1 | length 4
  Top Layer w0.3: R11.1 61.7,41.8 J2.4
NetLED1_1: LED1.1 R1.2 | length 1.4
  Top Layer w0.3: LED1.1 R1.2
NetLED2_1: LED2.1 R2.2 | length 1.8
  Top Layer w0.3: R2.2@21.8,22.5 LED2.1
NetLED3_1: LED3.1 R3.2 | length 1.4
  Top Layer w0.3: LED3.1 56.753,28.38 R3.2
NetLED4_1: LED4.1 R5.2 | length 1.7
  Top Layer w0.3: R5.2 21.953,20.253 LED4.1
NetLED5_1: LED5.1 R6.2 | length 1.5
  Top Layer w0.3: LED5.1 56.7,26.3 R6.2
NetLED6_1: LED6.1 R15.1 | length 5.6
  Top Layer w0.3: R15.1@7.014,47.289 7.014,48.1 7.19,48.276 10.433,48.276 10.609,48.1 10.609,47.774 LED6.1@11.094,47.289
NetLED7_1: R16.1 TXD.1 | length 2.5
  Top Layer w0.5: R16.1 18.243,43.024 18.243,40.727 TXD.1
NetLED8_1: R17.1 RXD.1 | length 2.6
  Top Layer w0.25: R17.1 R17.1@18.436,35.251
  Top Layer w0.5: R17.1@18.436,35.251 RXD.1
OSCIN: C20.2 R13.1 U2.5 Y2.2 | length 11.7
  Top Layer w0.3: U2.5 44.05,14.45 44.8,13.7 45.6,13.7 45.7,13.6 47.5,13.6 49.05,12.05 52.85,12.05 C20.2
OSCOUT: C22.2 R13.2 U2.6 Y2.1 | length 11.5
  Top Layer w0.3: U2.6 43.7,14.95 44.3,15.55 R13.2 ; R13.2@45.65,15.55 45.7,15.6 47.4,15.6 Y2.1 51.1,16.9 51.6,17.4 C22.2
PA0: J3.5 U2.10 | length 35.8
  Top Layer w0.3: U2.10 43.004,16.95 43.297,17.243 43.297,17.743 43.8,18.246 43.8,19.8 50.3,26.3 50.3,40.82 54.66,45.18 J3.5
PA1: J3.6 U1.1 U2.11 | length 86.9
  Top Layer w0.3: v1(40.247,17.5) 40.297,17.45 U2.11
  Bottom Layer w0.3: v1(40.247,17.5) 40.3,17.553 40.3,19.864 43.6,23.4 43.6,31.1 42.01,32.69 36.047,32.69 34.9,31.543 34.9,28.15 34.13,27.38 U1.1 32.82,27.38 31.2,29 31.2,31.25 22.85,39.6 22.85,47.45 24,48.6 51.55,48.6 52.12,48.03 52.12,47.88
PA2: J3.7 U1.2 U2.12 | length 61.1
  Top Layer w0.3: U2.12 42.743,17.95 43.15,18.357 43.15,20.75 43,20.9 v1(42.7,20.9) ; J3.7 51.05,45.63 51.05,42.9 v1(50.25,42.1)
  Bottom Layer w0.3: U1.2 33.329,30.049 33.329,30.889 35.84,33.4 42.386,33.4 44.63,31.156 44.63,22.83 v1(42.7,20.9) 44.364,20.9 46.6,23.136 46.6,36.1 50.25,39.75 v1(50.25,42.1) ; J3.7@49.2,46.72 J3.7
PA3: J3.8 U1.5 U2.13 | length 72.8
  Top Layer w0.3: U2.13 40.747,20.347 49.45,29.05 49.45,43.41 47.04,45.82 J3.8 47.04,47.54 47.9,48.4 55.2,48.4 56,47.6 56,45.693 53.65,43.343 v1(53.65,42.8)
  Bottom Layer w0.3: U1.5@33.2,38.25 U1.5 34.39,36.35 37.15,36.35 43.6,42.8 v1(53.65,42.8) ; J3.8@47.04,46.74 J3.8
PA4: J3.9 U2.14 | length 32.4
  Top Layer w0.3: U2.14@40.247,19.925 40.247,20.747 48.7,29.2 48.7,42.9 J3.9
PA5: J3.10 U2.15 | length 33.9
  Top Layer w0.3: U2.15@39.747,19.925 39.747,21.347 47.9,29.5 47.9,42.3 44.4,45.8 42.85,45.8 41.96,46.69 J3.10
PA6: J3.11 U2.16 | length 35.5
  Top Layer w0.3: U2.16@39.247,19.925 39.247,21.997 47.15,29.9 47.15,41.9 44.1,44.95 40.9,44.95 39.42,46.43 J3.11
PA7: J3.12 U2.17 | length 37
  Top Layer w0.3: J3.12@36.88,46.52 J3.12 ; J3.12@37.015,47.235 40.15,44.1 43.65,44.1 46.35,41.4 46.35,30 38.747,22.397 U2.17@38.747,19.925
PA8: J4.16 U2.29 | length 17.6
  Top Layer w0.3: J4.16 27,3.15 27,11.9 31.05,15.95 U2.29
  Bottom Layer w0.3: J4.16@26.8,2.95 J4.16 J4.16@26.95,3.1
PA9: J4.15 R7.1 U2.30 | length 44.4
  Top Layer w0.3: v1@28.42,28.12 R7.1 ; J4.15@29.38,3 29.38,3.82 27.7,5.5 27.7,11.736 31.414,15.45 U2.30 36.3,15.45 37.15,14.6 37.7,14.6 38.2,15.1 38.2,16.1 37.35,16.95 v1(36.2,16.95)
  Bottom Layer w0.3: v1(28.4,28.1) 28.4,24.54 29.84,23.1 32.907,23.1 34.2,21.807 34.2,20.25 33.34,19.39 33.34,18.36 34.85,16.95 v1(36.2,16.95) v1@36.05,16.8
PA10: J4.14 R9.1 U2.31 | length 42.9
  Top Layer w0.3: v1@26.42,28.12 R9.1 ; J4.14@31.92,3 31.2,3 28.4,5.8 28.4,11.5 31.85,14.95 U2.31 35.75,14.95 v1(36.4,14.3)
  Bottom Layer w0.3: v1(26.4,28.1) 26.4,23.55 27.45,22.5 32.8,22.5 33.593,21.707 33.593,20.4 32.739,19.547 32.739,17.961 v1(36.4,14.3)
PA11: J4.13 U2.32 | length 18.2
  Top Layer w0.3: U2.32 32.35,14.45 29.4,11.5 29.4,5.75 30.55,4.6 33.94,4.6 34.46,4.08 J4.13@34.46,3
PA12: J4.12 U2.33 | length 17.9
  Top Layer w0.3: U2.33 32.8,13.95 30.4,11.55 30.4,5.75 30.95,5.2 34.75,5.2 36.95,3 J4.12@37,3
PA15: J4.11 U2.38 | length 11.5
  Top Layer w0.3: U2.38@35.747,11.475 U2.38 35.747,10.193 34.7,9.146 34.7,6.87 38.57,3 J4.11@39.54,3
PB0: BT2.1 J3.13 R14.2 U2.18 | length 104.9
  Top Layer w0.3: U2.18@38.247,19.925 38.247,22.797 45.5,30.05 45.5,41.05 43.3,43.25 39.85,43.25 37.2,45.9 35.3,45.9 34.34,46.86 J3.13 36.34,49.1 66,49.1 67,48.1 67,43.4 68.053,42.347 BT2.1@68.053,30.797 ; BT2.1@61.17,30.797 BT2.1@68.053,30.797 ; R14.2 65.8,23.22 65.8,26.4 68.053,29.053 BT2.1@68.053,30.797
PB1: J3.14 U2.19 | length 39.3
  Top Layer w0.3: J3.14 31.8,46.3 32.85,45.25 36.647,45.25 39.447,42.45 42.4,42.45 44.65,40.2 44.65,30.039 37.747,23.136 U2.19@37.747,19.925
PB2: R11.2 U2.20 | length 39.8
  Top Layer w0.3: U2.20@37.247,19.925 U2.20 37.247,18.643 37.54,18.35 37.55,18.35 39.3,16.6 v1(39.4,16.6) ; v1(53.6,41.15) 55.35,41.15 56,41.8 R11.2
  Bottom Layer w0.3: v1(39.4,16.6) 42.45,16.6 47.5,21.65 47.5,35.208 53.55,41.1 v1(53.6,41.15)
PB3: J4.10 U2.39 | length 13.8
  Top Layer w0.3: U2.39@36.247,11.475 36.247,9.986 35.3,9.039 35.3,7.022 38.222,4.1 41.8,4.1 42.08,3.82 J4.10@42.08,3
PB4: J4.9 U2.40 | length 15.7
  Top Layer w0.3: U2.40@36.747,11.475 U2.40 36.747,9.779 35.9,8.932 35.9,7.129 38.429,4.6 43.95,4.6 44.62,3.93 J4.9@44.62,3
PB5: J4.8 U2.41 | length 17.6
  Top Layer w0.3: U2.41@37.247,11.475 37.247,9.572 36.45,8.775 36.45,7.286 38.636,5.1 46.1,5.1 47.16,4.04 J4.8@47.16,3
PB6: J4.7 U2.42 | length 19.8
  Top Layer w0.3: U2.42@37.747,11.475 U2.42 37.747,9.364 36.95,8.567 36.95,7.493 38.843,5.6 48.65,5.6 49.7,4.55 J4.7@49.7,3
PB7: J4.6 U2.43 | length 20.8
  Top Layer w0.3: U2.43@38.247,11.475 U2.43 38.247,9.157 37.55,8.46 37.55,7.6 39,6.15 49.09,6.15 J4.6@52.24,3
PB8: J4.5 U2.45 | length 22.5
  Top Layer w0.2: v1@38.853,12.8 v1(38.9,12.8)
  Top Layer w0.3: v1(38.9,12.8) 39.247,12.453 U2.45
  Bottom Layer w0.2: v1(38.9,12.8) v1@39.2,12.8
  Bottom Layer w0.3: v1@39.2,12.8 39.547,12.453 ; 39.547,12.453 40.65,11.35 44.043,11.35 49.393,6 52.65,6 54.78,3.87 J4.5@54.78,3
PB9: J4.4 U2.46 | length 25.2
  Top Layer w0.3: v1(39.7,13.7) 39.747,13.653 U2.46
  Bottom Layer w0.3: v1(39.7,13.7) 40,13.4 40,12.778 40.047,12.731 40.047,12.66 40.857,11.85 44.25,11.85 49.6,6.5 53.82,6.5 J4.4@57.32,3
PB10: J3.15 U2.21 | length 40.8
  Top Layer w0.3: J3.15 29.26,46.54 31.05,44.75 35.797,44.75 38.797,41.75 41.9,41.75 43.9,39.75 43.9,30.4 36.747,23.247 U2.21@36.747,19.925
PB11: J3.16 U2.22 | length 41.8
  Top Layer w0.3: J3.16 26.95,47.1 30,44.05 35.35,44.05 38.4,41 41.397,41 43.027,39.37 43.082,30.632 36.247,23.797 U2.22@36.247,19.925
PB12: J4.20 U2.25 | length 25.7
  Top Layer w0.3: J4.20@16.68,3 18.6,4.92 18.6,9.114 22.086,12.6 23.695,12.6 29.045,17.95 U2.25
PB13: J4.19 U2.26 | length 23.9
  Top Layer w0.3: J4.19 19.23,8.78 22.45,12 24.15,12 29.6,17.45 U2.26
PB14: IC1.2 J4.18 R4.1 U2.27 | length 83.1
  Top Layer w0.3: J4.18@21.76,3 21.76,3.335 21.386,3.708 21.386,3.714 19.9,5.2 19.9,8.6 22.5,11.2 24.225,11.2 29.975,16.95 U2.27 34.6,16.95 35.45,16.1 36.75,16.1 v1(37.4,15.45) ; R4.1 63.82,16.28 IC1.2@65.3,14.8
  Bottom Layer w0.3: v1(37.4,15.45) 37.3,15.35 37.3,10.31 37.91,9.7 40.05,9.7 41.1,10.75 43.936,10.75 49.186,5.5 51.9,5.5 53.4,4 53.4,2.72 54.52,1.6 57.7,1.6 58.65,2.55 58.65,3.7 59.25,4.3 60.4,4.3 61.35,5.25 61.35,13.25 62.9,14.8 IC1.2@65.3,14.8
PB15: J4.17 U2.28 | length 19.3
  Top Layer w0.3: J4.17@24.3,3 26.2,4.9 26.2,12.1 30.55,16.45 U2.28
PC13: J3.2 LED1.2 U2.2 | length 49.6
  Top Layer w0.3: v1(40.747,12.95) U2.2 ; LED1.2 53.073,30.5 v1(51.3,30.5) 51.3,35.8 53.95,38.45 57.05,38.45 57.7,39.1 57.7,42.8 59.85,44.95 61.65,44.95 62.28,45.58 J3.2
  Bottom Layer w0.3: v1(40.747,12.95) 41.35,12.95 50.6,22.2 50.6,28.7 51.3,29.4 v1(51.3,30.5)
PC14: C19.2 J3.3 LED3.2 U2.3 Y1.4 | length 81
  Top Layer w0.3: U2.3 43.25,13.45 47.4,9.2 48.05,8.55 v4(48.9,8.55) 50.5,8.55 51.05,9.1 51.15,9 51.45,9.3 Y1.4 54.3,8.9 55.6,10.2 C19.2 ; v1(51.3,24.6) 51.3,27.8 51.88,28.38 LED3.2 53.78,28.38 54.6,29.2 54.6,34.5 56.6,36.5 v1(59.8,36.5)
  Bottom Layer w0.3: v4@48.7,8.55 v4(48.9,8.55) 48.9,8.328 49.8,7.428 49.8,7.41 50.21,7 50.9,7 51.25,7.35 51.25,7.958 46.7,12.508 46.7,17.3 51.3,21.9 v1(51.3,24.6) ; v1(59.8,36.5) 62.2,36.5 63.6,37.9 63.6,47.8 62.65,48.75 60.35,48.75 59.74,48.14 J3.3 J3.3@59.8,47.04
PC15: C21.2 J3.4 LED5.2 U2.4 Y1.1 | length 91.7
  Top Layer w0.3: U2.4 43.55,13.95 45.1,12.4 v1(45.7,12.4) ; v1(52.5,24.678) 52.5,25.786 LED5.2 ; v1@53.1,7.5 v1(53.1,7.65) 53.05,7.6 50.6,7.6 v4(50.5,7.7) 50.5,6.15 50.95,5.7 Y1.1 54.9,5.7 56.2,7 C21.2 ; J3.4 58.6,48.5 65.57,48.5 66.25,47.82 66.25,34.95 64.6,33.3 v4(57.35,33.3)
  Bottom Layer w0.3: v1(45.7,12.4) 46.05,12.4 50.5,7.95 v4(50.5,7.7) ; v1(53.1,7.65) 52.85,7.65 51.3,9.2 51.3,12 47.5,15.8 47.5,17.2 52.5,22.2 v1(52.5,24.678) 52.5,28.39 v4@57.405,33.295
RESET: BT1.2 C18.1 J3.17 R12.2 U2.7 | length 71.7
  Top Layer w0.3: R12.2 29.8,21 29.8,20.3 C18.1 30.6,20.3 31.8,19.1 v1(34.04,19.1) ; v1(39.747,15.4) 39.797,15.45 U2.7 ; BT1.2@41.278,31.17 BT1.2@41.278,38.053
  Bottom Layer w0.3: J3.17 24.18,39.87 30.15,33.9 38.75,33.9 41.278,36.428 41.278,38.053 BT1.2@40.797,38.053 ; v1(39.747,15.4) 39.1,15.4 36.8,17.7 v1(35.4,17.7) 35.4,17.74 v1(34.04,19.1) 37.493,19.1 41.278,22.886 BT1.2@41.278,31.17
RST: R19.1 U3.9 | length 9.3
  Top Layer w0.25: R19.1 7.96,35.744 v1(8.493,35.212) ; v5(7.57,39.19) 7.57,40.26 7.96,40.65 U3.9
  Bottom Layer w0.25: v5(7.57,39.19) 8.493,38.267 v1(8.493,35.212)
RXD: R7.2 RXD.2 U1.3 U3.25 | length 29.7
  Top Layer w0.25: U3.25 14.085,39.645 14.641,39.645 15.05,39.236 15.05,37.854 15.364,37.54 RXD.2 16.15,38.505 16.514,38.869 19.531,38.869 21.11,37.29 21.11,36.026 v1(21.545,35.591) ; v1(22.85,31.543) 24.343,30.05 27.7,30.05 28.191,30.541 28.191,30.941 R7.2
  Top Layer w0.254: R7.2 28.42,31.675 29.205,32.46 U1.3
  Top Layer w0.3: U1.3@33.04,32.3 U1.3
  Bottom Layer w0.25: v1(21.545,35.591) 22.85,34.286 v1(22.85,31.543)
SUSP: R18.2 U3.11 | length 7.3
  Top Layer w0.25: U3.11 9.335,39.645 8.749,39.645 8.32,39.216 8.32,36.864 9.44,35.744 9.44,33.705 R18.2
SWCLK: J5.3 U2.37 | length 69.5
  Top Layer w0.3: U2.37 35.247,12.727 35.72,13.2 v1(36.3,13.2)
  Bottom Layer w0.3: J5.3 9.05,1.85 9.7,1.2 49.75,1.2 51,2.45 51,4.2 50.4,4.8 49.179,4.8 43.729,10.25 41.35,10.25 40.25,9.15 37.55,9.15 36.3,10.4 v1(36.3,13.2)
SWDIO: J5.2 U2.34 | length 62.3
  Top Layer w0.3: U2.34 34.95,13.45 v1(35.4,13.9) v1@35.4,13.95
  Bottom Layer w0.3: J5.2 11.59,2 11.89,1.7 47.7,1.7 48.45,2.45 48.45,4.75 43.45,9.75 41.75,9.75 40.63,8.63 37.02,8.63 35.4,10.25 v1(35.4,13.9)
TXD: R9.2 TXD.2 U1.4 U3.26 | length 28.4
  Top Layer w0.25: U3.26 14.85,40.15 15.16,40.46 TXD.2@15.844,40.46 ; TXD.2 15.864,40.46 TXD.2@15.844,40.46 ; v1(22.086,36.6) 22.086,37.434 20.101,39.419 16.065,39.419 15.844,39.64 TXD.2@15.844,40.46 ; v1(24,32.69) 25.5,31.19 R9.2
  Top Layer w0.3: R9.2 26.42,33.42 28,35 U1.4
  Bottom Layer w0.25: v1(22.086,36.6) 24,34.686 v1(24,32.69)
VBAT: HD1.1 SW1.1 | length 7.5
  Top Layer w1.5: HD1.1 3,16.55 4.45,18 SW1.1
VBUS: C24.1 C25.1 R15.2 R19.2 U3.7 U3.8 USB1.1 | length 25.7
  Top Layer w0.25: C25.1 C24.1 4.347,33.636 4.64,33.929 4.64,34.75 5.375,35.485 5.375,36.339 6.681,37.644 R19.2 6.745,37.68 6.745,40.285 7.6,41.14
  Top Layer w0.3: USB1.1@4.575,41.36 5.78,41.36 6.18,41.76 ; 8.78,41.17 7.57,41.17 6.98,41.76 6.18,41.76 ; R15.2 8.914,43.986 9.789,43.111 ; U3.7 10.21,42.69 9.789,43.111 ; 6.18,41.76 7.531,43.111 9.789,43.111
VCC3.3V: C5.1 C6.1 FB1.1 U1.6 | length 6.9
  Top Layer w0.8: U1.6@32.78,40.5 U1.6
  Top Layer w1: FB1.1 C6.1 C5.1 U1.6@32.78,40.5
VDD: C26.1 R16.2 R17.2 U3.6 | length 33.3
  Top Layer w0.3: U3.6 10.71,43.181 10.21,43.681 10.21,44.9 10.86,45.55 11.785,45.55 12.375,44.96 v3(12.61,44.96)
  Top Layer w0.4: C26.1 11.717,34.718 12.059,35.061 R17.2 16.32,35.035 v3(16.32,31.02) ; v3@14.39,43.12 v3(14.395,43.115) 14.399,43.111 R16.2
  Bottom Layer w0.4: v3(12.61,44.96) 12.61,44.9 v3(14.395,43.115) 14.395,32.945 v3(16.32,31.02)
VDD3V3: C1.2 IC1.1 J1.2 R4.2 | length 15.6
  Top Layer w0.8: C1.2 64.9,8.8 J1.2
  Top Layer w1: J1.2 67.5,11.4 67.5,15.69 IC1.1@65.2,17.99 ; IC1.1@65.3,18.07 65.89,18.66 R4.2@65.89,20.03
VIN: C2.1 C7.1 IC2.1 IC3.1 R8.1 SW1.2 | length 34
  Top Layer w0.8: R8.1@14.05,15.55 15.55,15.55 ; 15.5,15.5 15.55,15.55 ; IC3.1 15.55,15.55
  Top Layer w1: SW1.2 7.6,16.3 ; C2.1 8.9,7.6 7.6,8.9 7.6,12.6 ; R8.1@14,15.5 13.9,15.4 C7.1 8.5,15.4 7.6,16.3 ; IC2.1 9.44,10.76 7.6,12.6 ; 7.6,12.6 7.6,16.3
pads on no net: C1.0 C2.0 C3.0 C4.0 C5.0 C6.0 C7.0 C8.0 C9.0 C10.0 C11.0 C12.0 C13.0 C14.0 C15.0 C16.0 C17.0 C18.0 C19.0 C20.0 C21.0 C22.0 C23.0 FB1.0 IC2.0 IC3.0 IC3.4 S1.1 S2.1 S3.1 S4.1 SW1.4 SW1.5 U1.8 U1.9 U1.10 U3.1 U3.2 U3.10 U3.12 U3.13 U3.14 U3.15 U3.16 U3.17 U3.18 U3.19 U3.20 U3.21 U3.22 U3.23 U3.24 U3.27 U3.28 Y1.2 Y1.3

## Polygon pours and split planes (outlines as drawn)
GND on Top Layer "GND_L01_P000" (solid, remove dead copper, pour order 0): 0,50 71.5,50 71.5,0 71.49,0.01 0,0.01
GND on Bottom Layer "GND_L02_P001" (solid, remove dead copper, pour order 1): 71.5,50 71.5,0 0,0 0,49.88 0,50 0.04,50 0,50

## Silkscreen, mask and mechanical layers (free items; w line width, h text height)
Top Overlay:
  text "G" at 16.3,48.8 h0.9
  text "G" at 18.9,48.8 h0.9
  text "3V3" at 20.4,48.801 h0.9
  text "R" at 23.9,48.801 h0.9
  text "B11" at 25.6,48.801 h0.9
  text "B10" at 28.3,48.8 h0.9
  text "B1" at 31.25,48.8 h0.9
  text "B0" at 33.6,48.8 h0.9
  text "A7" at 36.3,48.8 h0.9
  text "A6" at 38.6,48.8 h0.9
  text "A5" at 41.2,48.8 h0.9
  text "A4" at 43.7,48.8 h0.9
  text "A3" at 46.2,48.8 h0.9
  text "A2" at 48.8,48.8 h0.9
  text "A1" at 51.5,48.8 h0.9
  text "A0" at 53.8,48.8 h0.9
  text "C15" at 56.1,48.8 h0.9
  text "C14" at 58.7,48.8 h0.9
  text "C13" at 61.3,48.8 h0.9
  text "G" at 64.5,48.8 h0.9
  text "0" at 66.86,43.85 h0.8
  text "C6" at 27.565,43.6 h0.8
  text "C5" at 30.1,43.6 h0.8
  text "Designed by Thanh Tung Pham - WNS - 20221" at 69.68,43.08 h0.9 r270
  text "R11" at 56.7,43 h0.8
  text "FB1" at 29.7,38.8 h0.8 r270
  text "1" at 66.92,38.23 h0.8
  text "R10" at 56.7,37.9 h0.8
  text "B0" at 64.33,35.96 h0.8
  text "B1" at 61.71,35.95 h0.8
  text "LED1" at 52.9,31.8 h0.8
  text "USER" at 63.3,31.8 h0.8
  text "R1" at 56.4,31.7 h0.8
  text "R7" at 30.39,29.63 h0.8 r90
  text "R9" at 25.124,29.45 h0.8 r90
  text "RST" at 37.8,29.45 h0.8
  text "LED3" at 49.4,28 h0.8
  text "R3" at 59.8,27.95 h0.8
  text "LED5" at 49.4,26 h0.8
  text "C15" at 31.25,25.05 h0.8
  text "R2" at 20.37,24.9 h0.8
  text "R12" at 27.87,24.84 h0.8
  text "R6" at 56.4,24.1 h0.8
  text "C14" at 35.95,23.6 h0.8 r270
  text "R14" at 60.9,22.8 h0.8
  text "OFF" at 9.8,22.75 h0.8
  text "C9" at 14.55,22.4 h0.8 r90
  text "ON" at 1.3,22.05 h0.8 r90
  text "C17" at 45.1,21.65 h0.8
  text "R4" at 61,19.7 h0.8
  text "C16" at 41.761,19 h0.8
  text "C22" at 51.9,18.6 h0.8
  text "R5" at 20.63,18.19 h0.8
  text "C18" at 28.2,18.15 h0.8
  text "C8" at 17.1,17.85 h0.8
  text "C4" at 20.4,16.7 h0.8
  text "C3" at 22.6,16.7 h0.8
  text "+" at 0.8,15.8 h1.2
  text "C19" at 56.3,13.2 h0.8
  text "R8" at 12.9,11.8 h0.8
  text "C7" at 10.4,11.7 h0.8
  text "R13" at 44.25,10.8 h0.8
  text "C13" at 28.3,10.15 h0.8
  text "C20" at 51.9,10.1 h0.8
  text "C12" at 28.2,8 h0.8
  text "C2" at 10.7,5.7 h0.8
  text "C23" at 12.9,5.7 h0.8
  text "C10" at 39.9,5.1 h0.8
  text "C11" at 42.4,5.1 h0.8
  text "C21" at 58.8,4.9 h0.8
  text "C1" at 62.15,4.9 h0.8
  text "B6" at 49,0.45 h0.9
  text "B7" at 51.55,0.45 h0.9
  text "B8" at 54,0.45 h0.9
  text "G" at 59.65,0.45 h0.9
  text "G" at 62.15,0.45 h0.9
  text "G" at 6.3,0.4 h0.9
  text "SWC" at 7.623,0.4 h0.9
  text "SWD" at 10.35,0.4 h0.9
  text "3V3" at 13.05,0.4 h0.9
  text "A12" at 36,0.4 h0.9
  text "A15" at 38.61,0.4 h0.9
  text "B5" at 46.4,0.4 h0.9
  text "B9" at 56.6,0.4 h0.9
  text "3V3" at 63.85,0.4 h0.9
  text "B12" at 15.9,0.35 h0.9
  text "B13" at 18.6,0.35 h0.9
  text "B14" at 21.2,0.35 h0.9
  text "B15" at 23.8,0.35 h0.9
  text "A8" at 26.4,0.35 h0.9
  text "A9" at 28.7,0.35 h0.9
  text "A11" at 33.6,0.35 h0.9
  text "B3" at 41.4,0.35 h0.9
  text "B4" at 43.9,0.35 h0.9
  text "A10" at 30.8,0.3 h0.9
Drill Drawing:
  the board outline again, w0.2